# EAGLE board X08E-005-A (EAGLE 6.3)
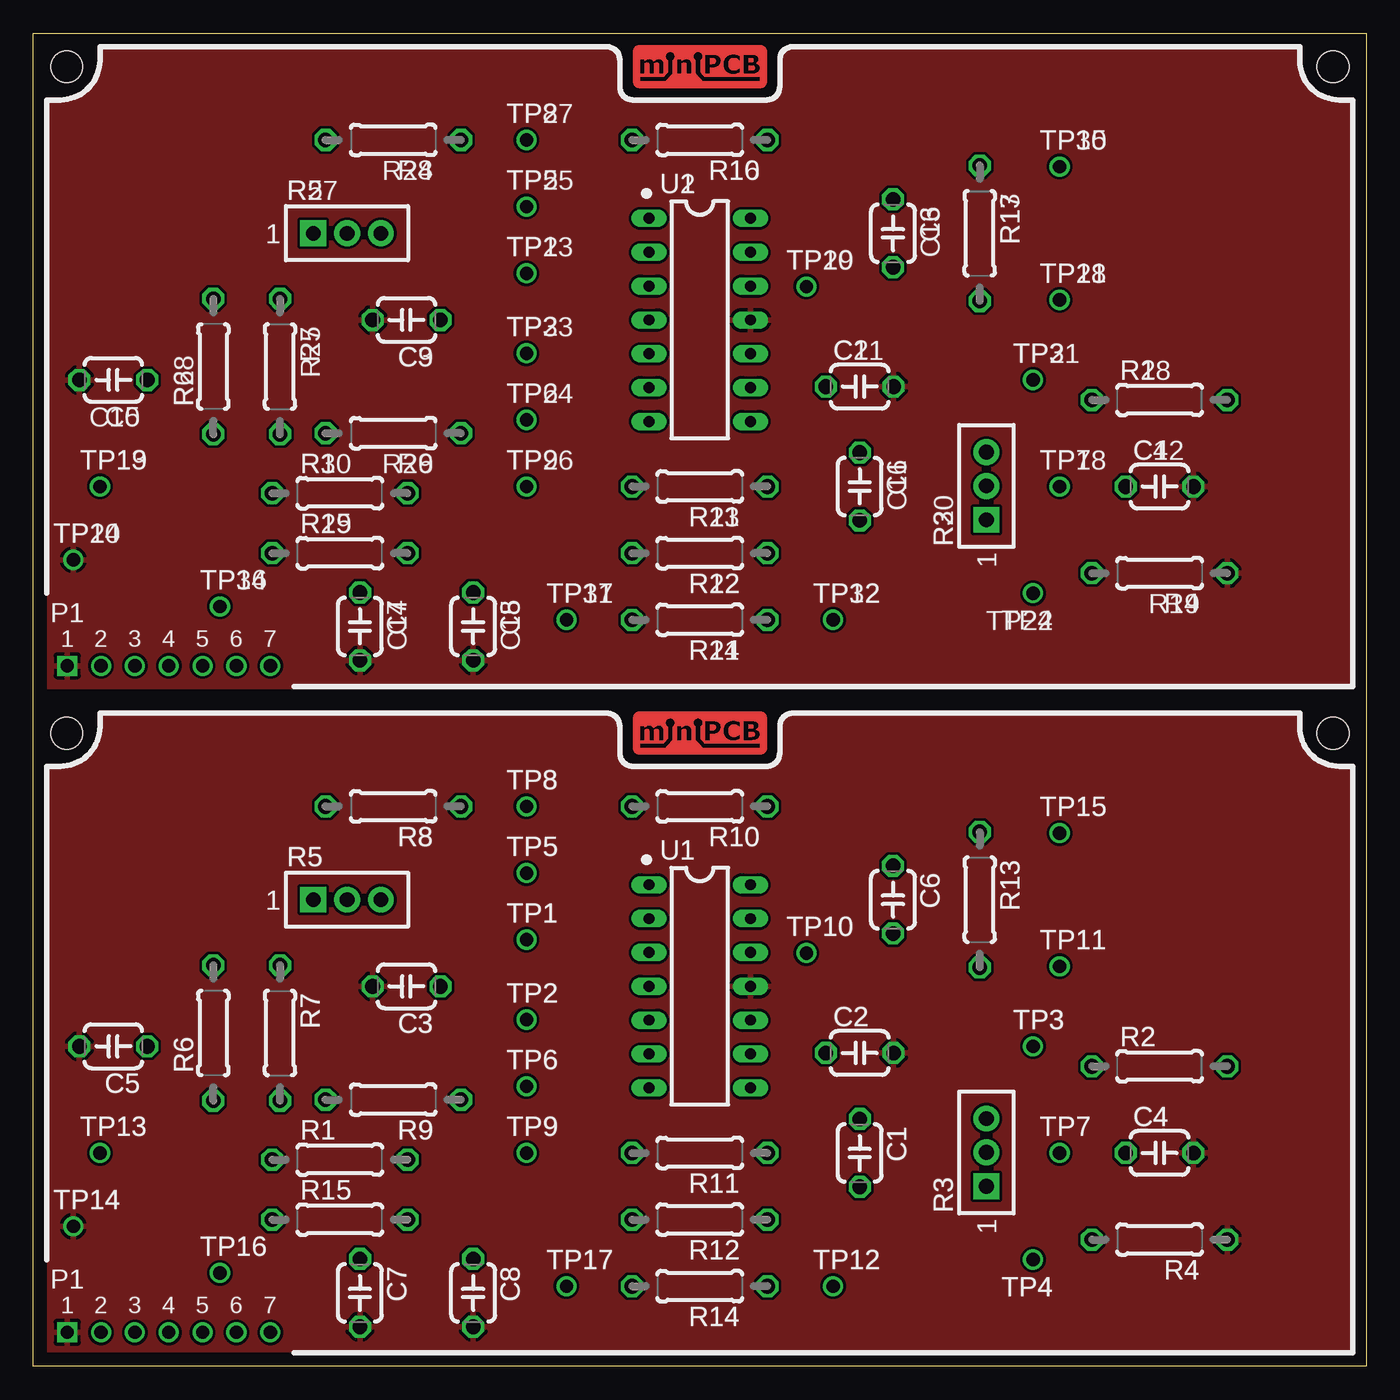
[diagram p0: board, top side]
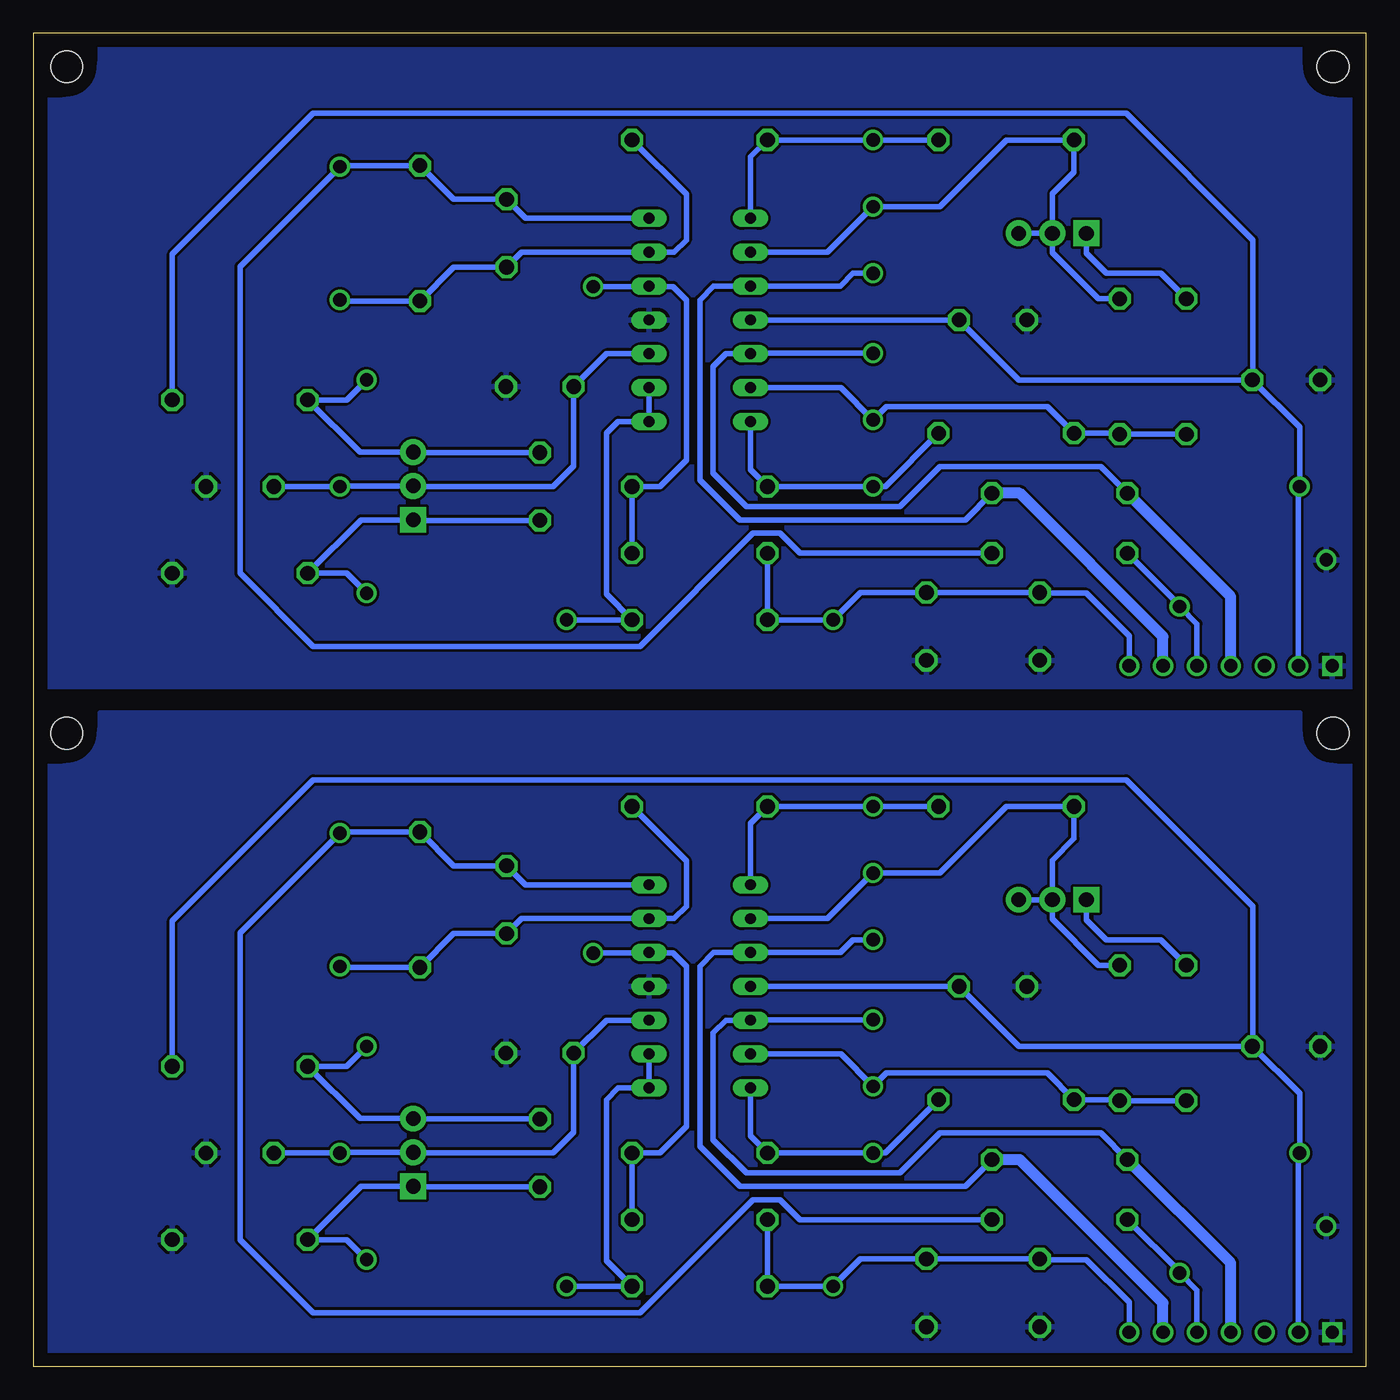
[diagram p1: board, bottom side, seen from below]

Size 100 x 100 mm. Coordinates in mm from the lower left corner, seen from the top.
Outline: 0,0 0,100 100,100 100,0 0,0
Copper layers (1*16): Top 0.035mm / dielectric 1.5mm / Bottom 0.035mm
Design rules "minipcb": minimum track width 10mil, minimum drill 24mil, track to track 8mil, track to pad 8mil, pad to pad 8mil, via to via 8mil, smd to smd 8mil, copper to edge 40mil, drill to drill 8mil, minimum pad ring 10mil, minimum via ring 8mil, stop-mask expansion 4mil, vias tented up to drill 20mil, thermal gap 10mil

## Footprints (pad centres in the part's own frame; a part is rotated, then mirrored left to right if it is on the bottom)
C050-024X044 = drill 1.1 octagon: 1 -2.54,0; 2 2.54,0
MINIPCB_7P_50X100 = drill 1 square: 1 2.54,2.54 | drill 1: 2 5.08,2.54; 3 7.62,2.54; 4 10.16,2.54; 5 12.7,2.54; 6 15.24,2.54; 7 17.78,2.54 | hole 2.4: 97.5,47.5; 2.5,47.5
0207/10 = drill 1.1 octagon: 1 -5.08,0; 2 5.08,0
TRIM_0100 = drill 1.1 pad 1.93 square: 1 0,0 | drill 1.1 pad 1.93: 2 2.54,0; 3 5.08,0
PINS_1_TESTPOINT_KE5000_NOTEXT = drill 1: 1 0,0
DIL14 = drill 0.813 long: 1 -7.62,-3.81; 2 -5.08,-3.81; 3 -2.54,-3.81; 4 0,-3.81; 5 2.54,-3.81; 6 5.08,-3.81; 7 7.62,-3.81; 8 7.62,3.81; 9 5.08,3.81; 10 2.54,3.81; 11 0,3.81; 12 -2.54,3.81; 13 -5.08,3.81; 14 -7.62,3.81

## Placement (x,y rotation side)
C1  [C050-024X044]  62,16 270 top
C2  [C050-024X044]  62,23.5 0 top
C3  [C050-024X044]  28,28.5 180 top
C4  [C050-024X044]  84.5,16 0 top
C5  [C050-024X044]  6,24 180 top
C6  [C050-024X044]  64.5,35 270 top
C7  [C050-024X044]  24.5,5.5 270 top
C8  [C050-024X044]  33,5.5 270 top
C9  [C050-024X044]  28,78.5 180 top
C10  [C050-024X044]  6,74 180 top
C11  [C050-024X044]  62,73.5 0 top
C12  [C050-024X044]  84.5,66 0 top
C13  [C050-024X044]  64.5,85 270 top
C14  [C050-024X044]  24.5,55.5 270 top
C15  [C050-024X044]  33,55.5 270 top
C16  [C050-024X044]  62,66 270 top
E$1  [MINIPCB_PANEL_IMAGEFRAME]  -26.67,-30.48 0 top  (outside the outline)
P1-  [MINIPCB_7P_50X100]  0,0 0 top
P1-1  [MINIPCB_7P_50X100]  0,50 0 top
R1  [0207/10]  23,15.5 0 top
R2  [0207/10]  84.5,22.5 0 top
R3  [TRIM_0100]  71.5,13.5 90 top
R4  [0207/10]  84.5,9.5 180 top
R5  [TRIM_0100]  21,35 0 top
R6  [0207/10]  13.5,25 90 top
R7  [0207/10]  18.5,25 270 top
R8  [0207/10]  27,42 180 top
R9  [0207/10]  27,20 180 top
R10  [0207/10]  50,42 180 top
R11  [0207/10]  50,16 180 top
R12  [0207/10]  50,11 180 top
R13  [0207/10]  71,35 270 top
R14  [0207/10]  50,6 180 top
R15  [0207/10]  23,11 0 top
R16  [0207/10]  50,92 180 top
R17  [0207/10]  71,85 270 top
R18  [0207/10]  84.5,72.5 0 top
R19  [0207/10]  84.5,59.5 180 top
R20  [TRIM_0100]  71.5,63.5 90 top
R21  [0207/10]  50,56 180 top
R22  [0207/10]  50,61 180 top
R23  [0207/10]  50,66 180 top
R24  [0207/10]  27,92 180 top
R25  [0207/10]  18.5,75 270 top
R26  [0207/10]  27,70 180 top
R27  [TRIM_0100]  21,85 0 top
R28  [0207/10]  13.5,75 90 top
R29  [0207/10]  23,61 0 top
R30  [0207/10]  23,65.5 0 top
TP1  [PINS_1_TESTPOINT_KE5000_NOTEXT]  37,32 0 top
TP2  [PINS_1_TESTPOINT_KE5000_NOTEXT]  37,26 0 top
TP3  [PINS_1_TESTPOINT_KE5000_NOTEXT]  75,24 0 top
TP4  [PINS_1_TESTPOINT_KE5000_NOTEXT]  75,8 180 top
TP5  [PINS_1_TESTPOINT_KE5000_NOTEXT]  37,37 0 top
TP6  [PINS_1_TESTPOINT_KE5000_NOTEXT]  37,21 0 top
TP7  [PINS_1_TESTPOINT_KE5000_NOTEXT]  77,16 0 top
TP8  [PINS_1_TESTPOINT_KE5000_NOTEXT]  37,42 0 top
TP9  [PINS_1_TESTPOINT_KE5000_NOTEXT]  37,16 0 top
TP10  [PINS_1_TESTPOINT_KE5000_NOTEXT]  58,31 0 top
TP11  [PINS_1_TESTPOINT_KE5000_NOTEXT]  77,30 0 top
TP12  [PINS_1_TESTPOINT_KE5000_NOTEXT]  60,6 0 top
TP13  [PINS_1_TESTPOINT_KE5000_NOTEXT]  5,16 0 top
TP14  [PINS_1_TESTPOINT_KE5000_NOTEXT]  3,10.5 0 top
TP15  [PINS_1_TESTPOINT_KE5000_NOTEXT]  77,40 0 top
TP16  [PINS_1_TESTPOINT_KE5000_NOTEXT]  14,7 0 top
TP17  [PINS_1_TESTPOINT_KE5000_NOTEXT]  40,6 0 top
TP18  [PINS_1_TESTPOINT_KE5000_NOTEXT]  77,66 0 top
TP19  [PINS_1_TESTPOINT_KE5000_NOTEXT]  5,66 0 top
TP20  [PINS_1_TESTPOINT_KE5000_NOTEXT]  3,60.5 0 top
TP21  [PINS_1_TESTPOINT_KE5000_NOTEXT]  75,74 0 top
TP22  [PINS_1_TESTPOINT_KE5000_NOTEXT]  75,58 180 top
TP23  [PINS_1_TESTPOINT_KE5000_NOTEXT]  37,82 0 top
TP24  [PINS_1_TESTPOINT_KE5000_NOTEXT]  37,71 0 top
TP25  [PINS_1_TESTPOINT_KE5000_NOTEXT]  37,87 0 top
TP26  [PINS_1_TESTPOINT_KE5000_NOTEXT]  37,66 0 top
TP27  [PINS_1_TESTPOINT_KE5000_NOTEXT]  37,92 0 top
TP28  [PINS_1_TESTPOINT_KE5000_NOTEXT]  77,80 0 top
TP29  [PINS_1_TESTPOINT_KE5000_NOTEXT]  58,81 0 top
TP30  [PINS_1_TESTPOINT_KE5000_NOTEXT]  77,90 0 top
TP31  [PINS_1_TESTPOINT_KE5000_NOTEXT]  40,56 0 top
TP32  [PINS_1_TESTPOINT_KE5000_NOTEXT]  60,56 0 top
TP33  [PINS_1_TESTPOINT_KE5000_NOTEXT]  37,76 0 top
TP34  [PINS_1_TESTPOINT_KE5000_NOTEXT]  14,57 0 top
U1  [DIL14]  50,28.5 270 top
U2  [DIL14]  50,78.5 270 top

## Library data of the parts
C1-C16 E$1 R1-R30 TP1-TP34 U1 U2 = minipcb
P1- P1-1 = minipcb; PART_NUMBER: X08D-005-A

## Nets
BIAS: C2.1 C4.1 R3.2 TP7.1 U1.10
BIAS1: C11.1 C12.1 R20.2 TP18.1 U2.10
GND: C2.2 C3.2 C4.2 C5.2 C7.2 C8.2 P1-.1 R4.1 TP14.1 U1.11
GND1: C9.2 C10.2 C11.2 C12.2 C14.2 C15.2 P1-1.1 R19.1 TP20.1 U2.11
N$1: R11.1 R12.1 TP10.1 U1.12
N$2: C7.1 C8.1 P1-.7 R12.2 R14.2 TP17.1
N$3: P1-.4 R1.1 TP2.1 U1.5
N$4: P1-.6 R1.2 TP1.1 U1.3
N$6: R5.2 R5.3 R7.1 R8.2 TP5.1 U1.2
N$7: R6.1 R7.2 R9.2 TP6.1 U1.6
N$8: R8.1 R10.2 TP8.1 U1.1
N$9: R9.1 R11.2 TP9.1 U1.7
N$10: R14.1 TP12.1 U1.8 U1.9
N$11: R5.1 R6.2
N$12: P1-.5 R15.1 TP16.1
N$13: R22.1 R23.1 TP29.1 U2.12
N$14: C14.1 C15.1 P1-1.7 R21.2 R22.2 TP31.1
N$15: P1-1.4 R30.1 TP33.1 U2.5
N$17: P1-1.6 R30.2 TP23.1 U2.3
N$18: R24.2 R25.1 R27.2 R27.3 TP25.1 U2.2
N$19: R25.2 R26.2 R28.1 TP24.1 U2.6
N$20: R16.2 R24.1 TP27.1 U2.1
N$21: R23.2 R26.1 TP26.1 U2.7
N$22: R21.1 TP32.1 U2.8 U2.9
N$23: R27.1 R28.2
N$24: P1-1.5 R29.1 TP34.1
NC: P1-.3
NC1: P1-1.3
OUT: C6.1 R13.1 R15.2 TP15.1 U1.14
OUT1: C13.1 R17.1 R29.2 TP30.1 U2.14
POT.1: C1.2 R3.1 R4.2 TP4.1
POT.2: C16.1 R18.1 R20.3 TP21.1
POT.3: C1.1 R2.1 R3.3 TP3.1
POT.4: C16.2 R19.2 R20.1 TP22.1
V+: C3.1 C5.1 P1-.2 R2.2 TP13.1 U1.4
V+1: C9.1 C10.1 P1-1.2 R18.2 TP19.1 U2.4
VFB: C6.2 R10.1 R13.2 TP11.1 U1.13
VFB1: C13.2 R16.1 R17.2 TP28.1 U2.13

## Tracks (layer width: path | path; a pad name or v marks a point on that pad's centre or on a via)
BIAS
  Bottom 0.406: U1.10 57,25.96 C2.1 59.46,17.54 61,16 71.46,16 R3.2 76.96,16.04 TP7.1 C4.1
BIAS1
  Bottom 0.406: U2.10 57,75.96 C11.1 59.46,67.54 61,66 71.46,66 R20.2 76.96,66.04 TP18.1 C12.1
GND
  pour Bottom: 1,1 99,1 99,45 98,45 arc-90 95,48 95,49 5,49 5,48 arc-90 2,45 1,45
  pour Top: 1,1 99,1 99,45 98,45 arc-90 95,48 95,49 57,49 arc90 56,48 56,46 arc-90 55,45 45,45 arc-90 44,46 44,48 arc90 43,49 5,49 5,48 arc-90 2,45 1,45
GND1
  pour Bottom: 1,51 99,51 99,95 98,95 arc-90 95,98 95,99 5,99 5,98 arc-90 2,95 1,95
  pour Top: 1,51 99,51 99,95 98,95 arc-90 95,98 95,99 57,99 arc90 56,98 56,96 arc-90 55,95 45,95 arc-90 44,96 44,98 arc90 43,99 5,99 5,98 arc-90 2,95 1,95
N$1
  Bottom 0.406: R12.1 R11.1 53,16 51,18 51,30 52,31 53.77,31 U1.12 53.85,31 TP10.1
N$2
  Bottom 0.406: R12.2 R14.2 TP17.1 37.96,8.04 C8.1 C7.1 24.46,8 21,8 17.78,4.78 P1-.7
N$3
  Bottom 0.406: TP2.1 46.15,26 U1.5 48.04,25.96 49,25 49,17 46.5,14.5 35,14.5 32,17.5 19.92,17.5 R1.1
  Bottom 0.813: P1-.4 10.16,7.74 R1.1
N$4
  Bottom 0.406: TP1.1 38.5,32 39.46,31.04 U1.3 48.96,31.04 50,30 50,16.5 47,13.5 30.08,13.5 R1.2
  Bottom 0.813: P1-.6 15.24,4.74 26,15.5 R1.2
N$6
  Bottom 0.406: U1.2 40.42,33.58 TP5.1 32,37 27,42 R8.2 21.92,39.58 23.54,37.96 R5.2 | R7.1 20.08,30.08 23.54,33.54 R5.2 | R5.3 R5.2
N$7
  Bottom 0.406: U1.6 39.42,23.42 TP6.1 36,22 23.92,22 R9.2 18.58,20 R7.2 R6.1
N$8
  Bottom 0.406: R8.1 TP8.1 R10.2 46.19,40.73 U1.1
N$9
  Bottom 0.406: U1.7 46.19,17.27 R11.2 TP9.1 36.08,16 R9.1
N$10
  Bottom 0.406: U1.9 U1.8 56.12,20.88 57,20 57,7.92 R14.1 TP12.1
N$11
  Bottom 0.406: R6.2 15.42,32 19.5,32 21,33.5 R5.1
N$12
  Bottom 0.406: P1-.5 12.7,5.7 TP16.1 14,7.08 R15.1
N$13
  Bottom 0.406: R22.1 R23.1 53,66 51,68 51,80 52,81 53.77,81 U2.12 53.85,81 TP29.1
N$14
  Bottom 0.406: R22.2 R21.2 TP31.1 37.96,58.04 C15.1 C14.1 24.46,58 21,58 17.78,54.78 P1-1.7
N$15
  Bottom 0.406: TP33.1 46.15,76 U2.5 48.04,75.96 49,75 49,67 46.5,64.5 35,64.5 32,67.5 19.92,67.5 R30.1
  Bottom 0.813: P1-1.4 10.16,57.74 R30.1
N$17
  Bottom 0.406: TP23.1 38.5,82 39.46,81.04 U2.3 48.96,81.04 50,80 50,66.5 47,63.5 30.08,63.5 R30.2
  Bottom 0.813: P1-1.6 15.24,54.74 26,65.5 R30.2
N$18
  Bottom 0.406: U2.2 40.42,83.58 TP25.1 32,87 27,92 R24.2 21.92,89.58 23.54,87.96 R27.2 | R25.1 20.08,80.08 23.54,83.54 R27.2 | R27.3 R27.2
N$19
  Bottom 0.406: U2.6 39.42,73.42 TP24.1 36,72 23.92,72 R26.2 18.58,70 R25.2 R28.1
N$20
  Bottom 0.406: R24.1 TP27.1 R16.2 46.19,90.73 U2.1
N$21
  Bottom 0.406: U2.7 46.19,67.27 R23.2 TP26.1 36.08,66 R26.1
N$22
  Bottom 0.406: U2.9 U2.8 56.12,70.88 57,70 57,57.92 R21.1 TP32.1
N$23
  Bottom 0.406: R28.2 15.42,82 19.5,82 21,83.5 R27.1
N$24
  Bottom 0.406: P1-1.5 12.7,55.7 TP34.1 14,57.08 R29.1
OUT
  Bottom 0.406: U1.14 63.08,36.12 C6.1 68.46,37.54 R13.1 76.92,40.08 TP15.1 84.5,32.5 84.5,9.5 79,4 54.5,4 46,12.5 44,12.5 42.5,11 R15.2
OUT1
  Bottom 0.406: U2.14 63.08,86.12 C13.1 68.46,87.54 R17.1 76.92,90.08 TP30.1 84.5,82.5 84.5,59.5 79,54 54.5,54 46,62.5 44,62.5 42.5,61 R29.2
POT.1
  Bottom 0.406: C1.2 71.46,13.46 R3.1 75.42,13.5 R4.2 76.5,9.5 TP4.1
POT.2
  Bottom 0.406: C16.1 71.46,68.54 R20.3 75.5,68.58 R18.1 76.5,72.5 TP21.1
POT.3
  Bottom 0.406: C1.1 71.46,18.54 R3.3 75.5,18.58 R2.1 76.5,22.5 TP3.1
POT.4
  Bottom 0.406: C16.2 71.46,63.46 R20.1 75.42,63.5 R19.2 76.5,59.5 TP22.1
V+
  Bottom 0.406: P1-.2 5.08,16 TP13.1 5,20.46 C5.1 | U1.4 C3.1 26.04,24 C5.1 | R2.2 89.58,33.42 79,44 18,44 8.5,34.5 8.5,24.04 C5.1
V+1
  Bottom 0.406: P1-1.2 5.08,66 TP19.1 5,70.46 C10.1 | U2.4 C9.1 26.04,74 C10.1 | R18.2 89.58,83.42 79,94 18,94 8.5,84.5 8.5,74.04 C10.1
VFB
  Bottom 0.406: R10.1 51,37.92 51,34.5 51.92,33.58 U1.13 63.38,33.58 C6.2 68.46,32.46 R13.2 76.92,29.92 TP11.1
VFB1
  Bottom 0.406: R16.1 51,87.92 51,84.5 51.92,83.58 U2.13 63.38,83.58 C13.2 68.46,82.46 R17.2 76.92,79.92 TP28.1

## Text on the board
_tNames: TP8 | TP15 | R8 | R10 | R5 | TP5 | U1 | R13 | C6 | TP1 | TP10 | TP11 | R7 | TP2 | C3 | C2 | TP3 | R2 | C5 | R6 | TP6 | R9 | C1 | C4 | TP13 | R1 | TP9 | TP7 | R11 | TP14 | R15 | R3 | R12 | TP16 | C7 | C8 | R4 | TP17 | TP12 | TP4 | R14 | TP8 | TP15 | R8 | R10 | R5 | TP5 | U1 | R13 | C6 | TP1 | TP10 | TP11 | R7 | TP2 | C3 | C2 | TP3 | R2 | C5 | R6 | TP6 | R9 | C1 | C4 | TP13 | R1 | TP9 | TP7 | R11 | TP14 | R15 | R3 | R12 | TP16 | C7 | C8 | R4 | TP17 | TP12 | TP4 | R14